# Altium PCB BugBuster_DAQ.PcbDoc (part 4 of 5)
Units mm, origin at the board's own origin, x right, y up, seen from the top; angles counter-clockwise.
Board outline 110 x 80 mm, 6 copper layers (Top Layer, Inner Layer 1, Inner Layer 2, Inner Layer 3, Inner Layer 4, Bottom Layer), stack 1.202 mm thick; 245 components, 205 nets, 1250 pads, 1565 vias.
Unrouted connection lines stored in the file: 8.
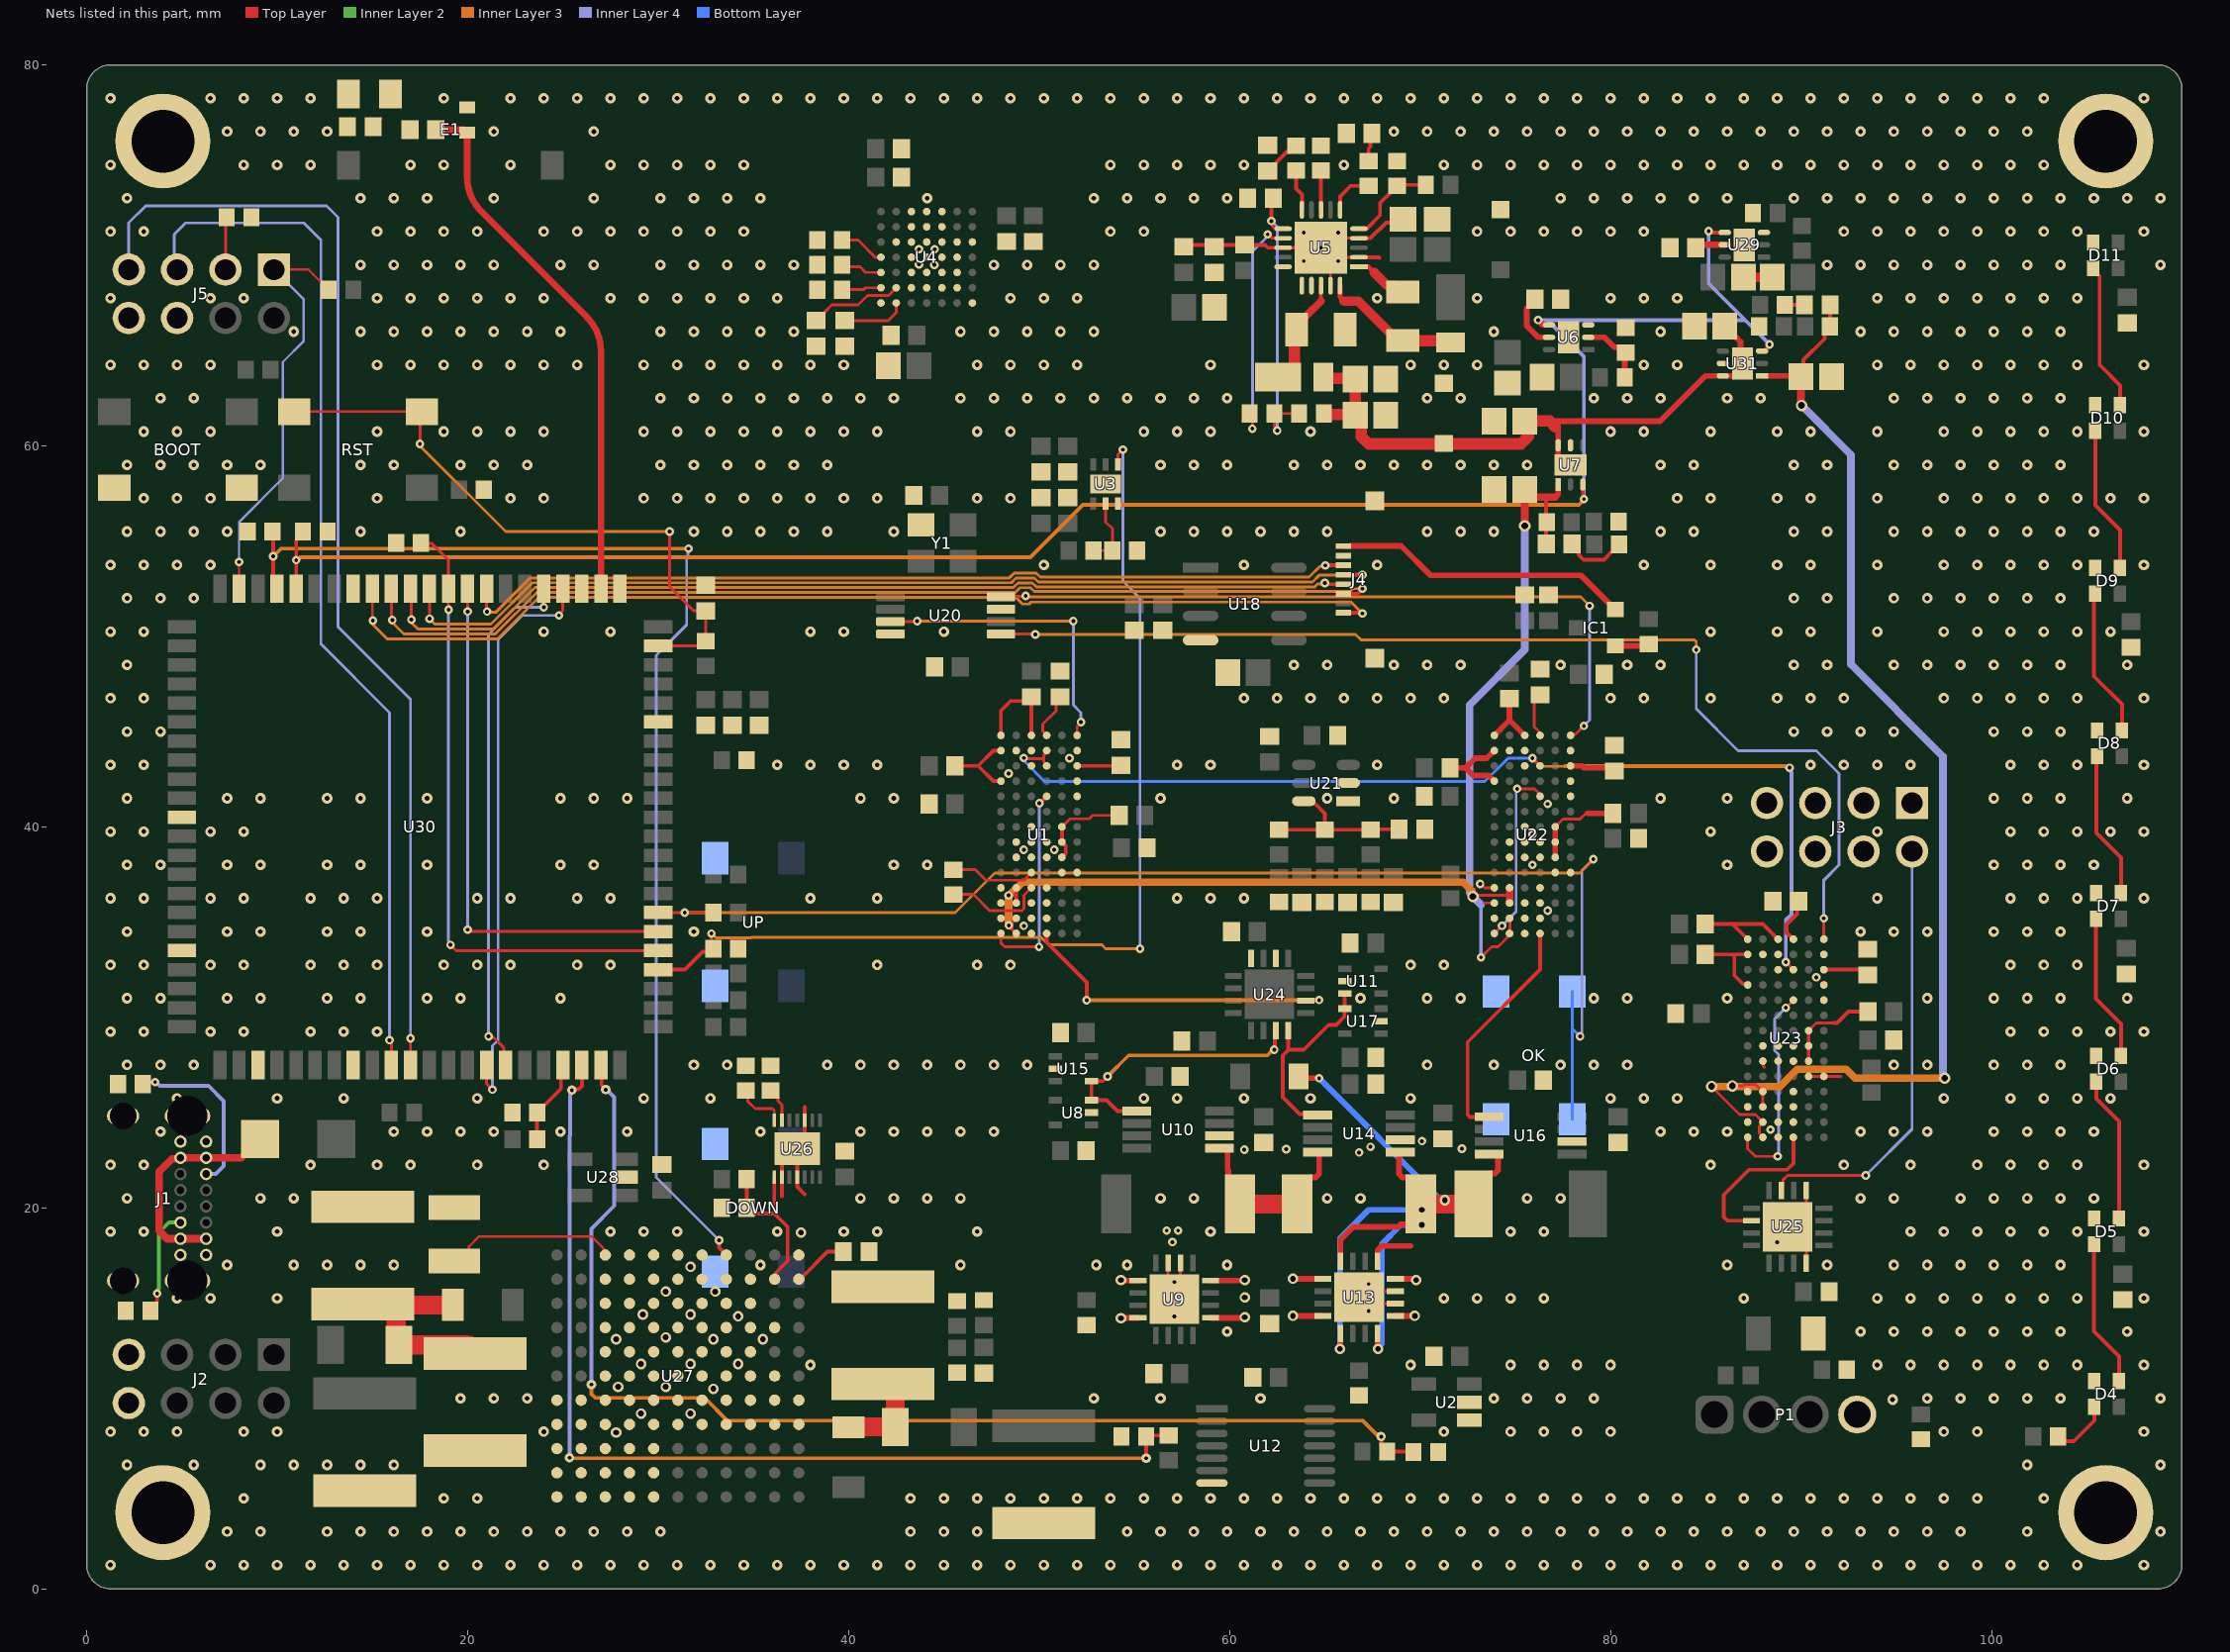
[diagram p7: the nets of this part, all layers, seen from the top]

## Via types
v1: diameter 0.55, hole 0.25, Top Layer to Bottom Layer, tented both sides, 1062 vias
v2: diameter 0.45, hole 0.2, Top Layer to Bottom Layer, tented both sides, 408 vias
v3: diameter 0.55, hole 0.3, Top Layer to Bottom Layer, tented both sides, 78 vias
v4: diameter 0.6, hole 0.35, Top Layer to Bottom Layer, tented both sides, 9 vias
v5: diameter 0.5, hole 0.2, Top Layer to Bottom Layer, tented both sides, 6 vias
v6: diameter 0.65, hole 0.35, Top Layer to Bottom Layer, tented both sides, 2 vias

## Nets (pads, with @x,y where several pads share a name; then routed paths per layer and width w, separated by ;. In a path a pad name is that pad's centre, name@x,y a point inside that pad or via, vN(x,y) a via of type N, cw(c..) or ccw(c..) an arc to the next point about the centre after c; other vN are vias at no path point) (continued)
-15V_LDO: C49.2 C50.1 R39.1 U1.B1 U1.B2 U1.B3 U1.B4 U7.1 U22.B1 U22.B2 U22.B3 U22.B4 | length 65.7
  Top Layer w0.15: v4(72.773,36.338) 72.835,36.4 74.7,36.4 ; v2(73.2,33.148) 73.752,33.7 74.1,33.7 74.597,34.197 74.597,34.228 74.7,34.331 U22.B1@74.7,34.4 74.727,34.427 74.727,35.173 U22.B2@74.7,35.2
  Top Layer w0.2: v2(48.4,36.4) 48.8,36.4 ; v2(48.411,34.827) v2@48.573,34.827 ; U1.B1@48.8,34.4 48.573,34.627 v2@48.573,34.827 ; U1.B2@48.8,35.2 48.573,34.973 v2@48.573,34.827 ; U1.B3@48.8,36 48.8,36.4 ; U1.B4@48.8,36.8 48.8,36.4 ; 76.5,57.3 76.625,57.175 C50.1@76.625,54.85
  Top Layer w0.3: 77.1,57.3 77.25,57.45 U7.1@77.25,57.972
  Top Layer w0.4: U22.B3@74.7,36 74.7,36.4 U22.B4@74.7,36.8 ; v4(75.5,55.8) C49.2@75.5,57.7 75.9,57.3 76.5,57.3 77.1,57.3
  Inner Layer 3 w0.4: v2@48.4,36.377 v2@48.4,36.366 ; v2(48.411,34.827) 48.411,34.841 48.4,34.852 v2@48.4,36.366 ; v4(72.773,36.338) 72.735,36.376 72.735,36.637 72.271,37.1 49.134,37.1 v2@48.4,36.366
  Inner Layer 4 w0.2: v2(73.2,33.148) 73.2,35.911
  Inner Layer 4 w0.4: 73.2,35.911 v4(72.773,36.338) 72.773,36.392 72.6,36.565 72.6,46.4 75.5,49.3 v4(75.5,55.8)
-24V_LDO: C96.2 C97.1 R77.1 U23.B1 U23.B2 U23.B3 U23.B4 U31.1 | length 66.3
  Top Layer w0.15: v4(85.3,26.375) 86.775,24.9 87.6,24.9 U23.B2@88,24.5 88,24.464 87.82,24.284 87.82,23.916 88,23.736 U23.B1@88,23.7 ; v4(86.4,26.4) 86.963,26.4 87.043,26.48 87.62,26.48 U23.B4@88,26.1 U23.B3@88,25.3
  Top Layer w0.2: C96.2@90,63.425 90.133,63.558 90.133,64.508 91.246,65.621 91.246,66.004 R77.1@91.517,66.275 91.53,66.288 C97.1@91.53,67.4
  Top Layer w0.3: U31.1@87.953,63.675 89.95,63.675 C96.2@90,63.625
  Top Layer w0.4: C96.2@90,63.425 90,62.15 v4(90.025,62.125)
  Inner Layer 3 w0.4: v4(85.3,26.375) 85.313,26.362 88.887,26.362 89.8,27.275 92.375,27.275 92.85,26.8 v4(97.55,26.8)
  Inner Layer 4 w0.4: v4(90.025,62.125) 92.625,59.525 92.625,48.525 97.45,43.7 97.45,26.954 97.55,26.854 v4(97.55,26.8)
-26V_BOOST: C19.2 C20.2 C48.2 C95.2 D2.2 D13.1 R23.1 U7.6 U7.7 U31.6 U31.7 | length 34.6
  Top Layer w0.3: 76.8,61.3 82.6,61.3 84.975,63.675 U31.6@85.897,63.675 86.525,63.675 86.925,64.075 U31.7@86.925,64.325 86.826,64.424 86.826,65.449 86.55,65.725 86.5,65.725 86,66.225 C95.2@86,66.275 ; 77.1,61 77.25,60.85 U7.6@77.25,60.028 77.25,59.4 77.65,59 U7.7@77.9,59
  Top Layer w0.6: D2.2@64.925,63.6 64.975,63.55 66.55,63.55 C20.2@66.6,63.5 C19.2@66.6,61.6 ; R23.1@64.95,61.7 65,61.65 66.55,61.65 C19.2@66.6,61.6 ; 77.1,61 76.8,61.3 C48.2@75.5,61.3 75.7,61.1 75.7,60.5 75.3,60.1 67.3,60.1 66.911,60.489 66.911,61.289 C19.2@66.6,61.6
ADAQ_IN1: U1.D1 U24.6 | length 17.3
  Top Layer w0.2: U1.D1@50.4,34.4 50.4,33.939 50.8,33.539 52.5,31.839 v2(52.5,30.9) ; U24.6@64.002,30.875 64.018,30.89 64.685,30.89 v2(64.7,30.906)
  Inner Layer 3 w0.2: v2(52.5,30.9) 64.694,30.9 v2(64.7,30.906)
ADAQ_IN3: U23.D1 U25.6 | length 8.4
  Top Layer w0.2: U25.6@87.398,19.325 86.15,19.325 85.95,19.525 85.95,20.675 87.275,22 89.275,22 89.6,22.325 U23.D1@89.6,23.7
C6_BOOT: U30.9 U30.72 | length 27.9
  Top Layer w0.15: v2(20,34.6) 20.081,34.6 20.181,34.5 U30.72@30,34.5 ; v2(20,51.3) U30.9@20,52.5
  Inner Layer 4 w0.15: v2(20,34.6) v2(20,51.3)
C6_RST: R65.1 U30.10 U30.71 | length 33.1
  Top Layer w0.15: R65.1@17.55,54.9 17.562,54.888 18.112,54.888 19,54 U30.10@19,52.5 v2(19,51.4) ; v2(19.1,33.8) 19.4,33.5 U30.71@30,33.5
  Inner Layer 4 w0.15: v2(19,51.4) 19,33.981 19.1,33.881 v2(19.1,33.8)
C6_RX: U30.5 U30.60 | length 27.6
  Top Layer w0.15: v2(21.1,29) 21.157,28.943 21.354,28.943 21.909,28.387 21.909,27.591 U30.60@22,27.5 ; v2(24,51.527) U30.5@24,52.5
  Inner Layer 4 w0.15: v2(21.1,29) 21.1,50.1 22.527,51.527 v2(24,51.527)
C6_TX: U30.4 U30.59 | length 30.4
  Top Layer w0.15: U30.59@21,27.5 21,26.5 v2(21.3,26.2) ; v2(24.8,51.1) 24.8,51.138 25,51.338 U30.4@25,52.5
  Inner Layer 4 w0.15: v2(21.3,26.2) 21.3,28.5 21.6,28.8 21.6,49.85 22.85,51.1 v2(24.8,51.1)
CLOCK_0: U1.F14 U20.3 | length 15.9
  Top Layer w0.15: U20.3@42.2,50.775 43.575,50.775 v2(43.6,50.8) ; U1.F14@52,44.8 52,45.262 52.2,45.462 v2(52.2,45.5)
  Inner Layer 3 w0.15: v2(43.6,50.8) v2(51.8,50.8)
  Inner Layer 4 w0.15: v2(51.8,50.8) 51.8,46.4 52.2,46 v2(52.2,45.5)
CLOCK_1: U20.8 U22.F14 | length 38.5
  Top Layer w0.15: U20.8@48,52.075 48.024,52.099 49.276,52.099 v2(49.3,52.123) ; U22.F14@77.9,44.8 77.949,44.849 78.149,44.849 v2(78.6,45.3)
  Inner Layer 3 w0.15: v2(49.3,52.123) 49.352,52.071 78.429,52.071 v2(78.9,51.6)
  Inner Layer 4 w0.15: v2(78.6,45.3) 78.9,45.6 v2(78.9,51.6)
CLOCK_2: U20.5 U23.F14 | length 58.1
  Top Layer w0.15: U20.5@48,50.125 49.775,50.125 v2(49.8,50.1) ; U23.F14@91.2,34.1 v2(91.2,35.2)
  Inner Layer 3 w0.15: v2(49.8,50.1) 66.62,50.1 66.912,49.807 84.412,49.807 84.5,49.72 84.5,49.302 v2(84.502,49.3)
  Inner Layer 4 w0.15: v2(84.502,49.3) 84.502,46.198 86.7,44 90.8,44 92,42.8 92,38 91.2,37.2 v2(91.2,35.2)
CLOCK_3: U20.7
CSA_2: U11.3 U14.5 U17.4 U24.4 | length 10.7
  Top Layer w0.2: U24.4@63.075,29.298 63.075,28.325 63.1,28.3 ; U14.5@64.628,24.875 64.587,24.917 63.683,24.917 62.8,25.8 62.8,28 63.1,28.3 ; U11.3@66.05,31.25 U17.4@66.05,30.45 66.05,30.05 65.6,29.6 65.2,29.6 63.9,28.3 63.1,28.3
CSA_005: U16.5 U22.D1 | length 12.3
  Top Layer w0.2: U16.5@73.628,24.775 72.617,24.775 72.5,24.892 72.5,28.7 76.3,32.5 U22.D1@76.3,34.4
CSA_51: U8.3 U10.5 U15.4 U24.3 | length 14.9
  Top Layer w0.2: v2(53.6,26.9) 53.35,26.65 U15.4@52.75,26.65 U8.3@52.75,25.65 53.55,25.65 54.125,25.075 U10.5@55.128,25.075 ; v2(62.348,28.3) 62.386,28.339 62.386,29.259 U24.3@62.425,29.298
  Inner Layer 3 w0.2: v2(53.6,26.9) 54.7,28 61.98,28 62.28,28.3 v2(62.348,28.3)
DAQ_SYNC: U1.D12 U1.D13 U22.D12 U23.D12 | length 55
  Top Layer w0.15: v2(49.2,43.615) 49.232,43.583 50.25,43.583 ; U1.D12@50.4,43.2 50.4,43.266 50.25,43.416 50.25,43.583 ; U1.D13@50.4,44 50.4,43.931 50.297,43.828 50.297,43.797 50.25,43.75 50.25,43.583 ; v2(89.2,32.9) U23.D12@89.6,32.5
  Top Layer w0.2: v2(75.9,43.6) U22.D12@76.3,43.2
  Inner Layer 3 w0.127: v2(75.9,43.6) 76.321,43.179 77.6,43.179
  Inner Layer 3 w0.2: 77.6,43.179 89.158,43.179 89.189,43.148 89.352,43.148 v2(89.4,43.1)
  Inner Layer 4 w0.2: v2(89.2,32.9) 89.2,35.1 89.5,35.4 89.5,42.858 89.448,42.91 89.448,43.052 v2(89.4,43.1)
  Bottom Layer w0.15: v2(49.2,43.615) 49.257,43.558 49.257,43.418 50.287,42.388 50.999,42.388 51.012,42.375 73.4,42.375 74.625,43.6 v2(75.9,43.6)
DN_KEY: OK.B1 OK.B2 R44.1 U30.73 | length 68.6
  Top Layer w0.15: U30.73@30,35.5 v2(31.4,35.5) R44.1@32.9,35.5
  Inner Layer 3 w0.15: v2(31.4,35.5) 45.6,35.5 47.675,37.575 78.375,37.575 v2(79.1,38.3)
  Inner Layer 4 w0.15: v2(78.4,29) 78.4,29.081 78.5,29.181 78.5,37.7 v2(79.1,38.3)
  Bottom Layer w0.15: OK.B2@78,24.65 78,29.4 ; OK.B1@78,31.35 78,29.4 ; v2(78.4,29) 78,29.4
EN_PGA1: U1.A1 U1.D10 | length 10.7
  Top Layer w0.15: U1.A1@48,34.4 48,33.9 48.2,33.7 49.996,33.7 v2(49.998,33.698)
  Top Layer w0.2: v2(50.018,41.234) 50.034,41.234 U1.D10@50.4,41.6
  Inner Layer 4 w0.15: v2(49.998,33.698) 50.018,33.718 v2(50.018,41.234)
EN_PGA2: U22.A1 U22.D10 | length 9.6
  Top Layer w0.15: U22.A1@73.9,34.4 v2(74.3,34.8) ; v2(75.1,42) 76,42 76.197,41.803 76.197,41.772 76.3,41.669 U22.D10@76.3,41.6
  Inner Layer 4 w0.15: v2(74.3,34.8) 74.3,34.9 74.302,34.898 74.398,34.898 75.043,35.543 75.043,41.943 v2(75.1,42)
EN_PGA3: U23.A1 U23.D10 | length 11.1
  Top Layer w0.15: U23.A1@87.197,23.703 87.197,23.103 87.6,22.7 v2(88.773,22.7) ; v2(89.2,30.5) U23.D10@89.6,30.9
  Inner Layer 4 w0.15: v2(88.773,22.7) 88.827,22.754 88.827,28.048 88.625,28.25 88.625,29.925 v2(89.2,30.5)
EXT_A0: U24.10
GND: BOOT.A1 BOOT.A2 C1.1 C2.1 C3.1 C4.1 C5.1 C6.1 C7.1 C8.1 C9.1 C10.1 C11.1 C12.1 C13.1 C14.1 C15.1 C16.1 C17.2 C18.1 C19.1 C20.1 C21.1 C22.1 C23.1 C24.1 C25.1 C26.1 C27.2 C28.1 C29.1 C30.1 C31.1 C32.1 C33.1 C34.1 C35.1 C36.2 C37.1 C38.1 C39.1 C40.1 C41.1 C42.1 C43.2 C44.1 C45.1 C46.1 C47.2 C48.1 C49.1 C51.1 C52.1 C53.1 C54.1 C55.1 C56.1 C57.1 C58.1 C59.1 C60.1 C61.1 C62.1 C63.1 C64.1 C65.1 C66.1 C67.1 C68.1 C69.1 C70.1 C72.1 C73.1 C74.1 C75.1 C76.1 C77.1 C78.1 C79.1 C80.1 C81.1 C82.1 C83.1 C84.1 C86.1 C87.1 C88.1 C89.1 C90.1 C91.1 C92.1 C93.1 C94.2 C95.1 C96.1 C98.1 D4.2 D5.2 D6.2 D7.2 D8.2 D9.2 D10.2 D11.2 D12.1 D13.2 DNP.2 DOWN.A1 DOWN.A2 E1.1 J1.1 J1.2 J1.3 J1.4 J1.A1 J1.A12 J1.B1 J1.B12 J2.7 J2.8 J3.1 J3.3 J3.5 J3.7 J4.7 J4.MP1 J4.MP2 J5.6 J5.8 L1.2 L3.1 OK.A1 OK.A2 P1.4 pad.1 pad.2 pad.3 pad.4 R2.1 R3.1 R5.1 R6.1 R8.1 R9.1 R10.1 R11.1 R14.1 R18.1 R19.1 R20.2 R21.1 R22.1 R25.1 R28.1 R34.1 R35.1 R36.1 R37.1 R41.2 R54.1 R57.1 R59.1 R60.1 R61.2 R62.1 R63.1 R64.2 R65.2 R70.2 R71.2 R75.1 U1.A2 U1.A3 U1.A4 U1.B6 U1.B7 U1.B13 U1.C1 U1.C2 U1.C3 U1.C6 U1.C7 U1.C8 U1.C12 U1.C13 U1.D2 U1.D3 U1.D4 U1.D6 U1.D7 U1.E5 U1.F5 U1.F10 U1.F11 U1.F13 U2.1 U2.2 U3.3 U3.7 U4.A1 U4.A7 U4.B2 U4.B3 U4.B4 U4.B5 U4.C2 U4.C3 U4.C4 U4.C5 U4.D2 U4.D3 U4.D4 U4.D5 U4.E1 U4.E2 U4.E3 U4.E4 U4.E5 U4.E6 U4.F3 U4.F4 U4.F5 U4.G3 U4.G4 U4.G5 U5.2 U5.4 U5.13 U5.19 U5.21 U6.3 U6.7 U7.5 U8.2 U9.2 U9.3 U9.17 U10.2 U11.2 U12.7 U13.2 U13.3 U13.17 U14.2 U15.2 U16.2 U17.2 U18.4 U20.4 U21.1 U21.2 U22.A2 U22.A3 U22.A4 U22.B6 U22.B7 U22.B13 U22.C1 U22.C2 U22.C3 U22.C6 U22.C7 U22.C8 U22.C12 U22.C13 U22.D2 U22.D3 U22.D4 U22.D6 U22.D7 U22.E5 U22.F5 U22.F10 U22.F11 U22.F13 U23.A2 U23.A3 U23.A4 U23.B6 U23.B7 U23.B13 U23.C1 U23.C2 U23.C3 U23.C6 U23.C7 U23.C12 U23.C13 U23.D2 U23.D3 U23.D4 U23.D6 U23.D7 U23.E5 U23.F5 U23.F10 U23.F11 U23.F13 U24.12 U25.1 U25.12 U25.17 U26.3 U26.9 U26.11 U26.15 U27.A7 U27.A8 U27.A9 U27.A10 U27.A11 U27.B7 U27.B8 U27.B9 U27.B10 U27.B11 U27.C7 U27.C8 U27.C9 U27.C10 U27.C11 U27.D2 U27.D3 U27.D4 U27.D5 U27.D6 U27.D7 U27.D8 U27.D9 U27.D10 U27.D11 U27.E1 U27.E2 U27.E3 U27.E4 U27.E5 U27.E6 U27.E7 U27.E8 U27.E9 U27.E10 U27.E11 U27.F2 U27.F3 U27.F4 U27.F5 U27.F6 U27.F7 U27.F8 U27.F9 U27.G3 U27.G4 U27.G5 U27.G6 U27.G7 U27.G8 U27.G9 U27.H2 U27.H3 U27.H4 U27.H5 U27.H6 U27.H7 U27.H8 U27.H9 U27.J3 U27.J4 U27.J5 U27.J6 U27.J7 U27.J8 U27.J9 U27.K3 U27.K4 U27.K5 U27.K6 U27.K7 U27.K8 U27.K9 U27.L1 U27.L5 U27.L6 U27.L7 U27.L8 U28.2 U29.3 U29.7 U30.1 U30.3 U30.15 U30.33 U30.40 U30.47 U30.52 U30.83 U31.5 UP.A1 UP.A2 Y1.2 | length 42.5
  Top Layer w0.15: U9.3@56.775,17.102 56.775,15.525 U9.17@57.1,15.2 57.425,15.525 U9.2@57.425,17.102 ; U5.19@65.3,68.409 U5.21@65.3,69.9 ; U5.2@66.791,69.9 U5.21@65.3,69.9 ; U5.4@66.791,70.9 65.3,70.9 v2(64.8,70.4) U5.21@65.3,69.9 ; U13.2@68.702,14.975 67.125,14.975 U13.17@66.8,15.3 67.125,15.625 U13.3@68.702,15.625 ; v2(73.152,37) 73.19,37 73.39,36.8 U22.A4@73.9,36.8 ; 73.4,36 U22.A3@73.9,36 ; U23.B6@88,27.7 88.027,27.673 88.027,27.414 88.064,27.377 ; U25.12@90.275,17.098 90.275,18.025 U25.17@89.3,19 90.275,19.975 U25.1@90.275,20.902 ; U23.E5@90.4,26.9 92.1,26.9
  Top Layer w0.2: 36.5,20.6 U26.9@36.5,21.601 36.5,22.349 37.251,23.1 U26.15@37.3,23.1 ; 37.7,20.7 37.3,21.1 U26.11@37.3,21.601 U26.15@37.3,23.1 ; 37.7,25.3 U26.3@37.7,24.599 37.7,23.5 U26.15@37.3,23.1 ; C12.1@57.6,70.45 57.7,70.55 C17.2@60.8,70.55 61.85,70.55 62,70.4 U5.13@62.809,70.4 v2(64.8,70.4) ; U5.2@66.791,69.9 67.85,69.9 67.875,69.875 ; U5.4@66.791,70.9 67.4,70.9 68.217,71.717 68.917,71.717 C16.1@69.1,71.9
  Top Layer w0.5: C93.1@86.975,68.85 C92.1@88.5,68.85
  other v1: 1.25,1.25 6.5,1.25 8.25,1.25 10,1.25 11.75,1.25 13.5,1.25 15.25,1.25 17,1.25 18.75,1.25 20.5,1.25 22.25,1.25 24,1.25 25.75,1.25 27.5,1.25 29.25,1.25 31,1.25 32.75,1.25 34.5,1.25 36.25,1.25 38,1.25 39.75,1.25 41.5,1.25 43.25,1.25 45,1.25 46.75,1.25 48.5,1.25 50.25,1.25 52,1.25 53.75,1.25 55.5,1.25 57.25,1.25 59,1.25 60.75,1.25 62.5,1.25 64.25,1.25 66,1.25 67.75,1.25 69.5,1.25 71.25,1.25 73,1.25 74.75,1.25 76.5,1.25 78.25,1.25 80,1.25 81.75,1.25 83.5,1.25 85.25,1.25 87,1.25 88.75,1.25 90.5,1.25 92.25,1.25 94,1.25 95.75,1.25 97.5,1.25 99.25,1.25 101,1.25 102.75,1.25 104.5,1.25 108,1.25 7.375,3 9.125,3 12.625,3 14.375,3 16.125,3 17.875,3 19.625,3 21.375,3 23.125,3 24.875,3 26.625,3 28.375,3 30.125,3 43.25,3 45,3 46.75,3 54.625,3 56.375,3 58.125,3 59.875,3 61.625,3 63.375,3 65.125,3 66.875,3 68.625,3 70.375,3 72.125,3 73.875,3 75.625,3 77.375,3 79.125,3 80.875,3 82.625,3 84.375,3 86.125,3 87.875,3 89.625,3 91.375,3 93.125,3 94.875,3 96.625,3 98.375,3 101.875,3 108.875,3 8.25,4.75 18.75,4.75 20.5,4.75 43.25,4.75 45,4.75 46.75,4.75 48.5,4.75 50.25,4.75 52,4.75 53.75,4.75 55.5,4.75 57.25,4.75 59,4.75 60.75,4.75 62.5,4.75 64.25,4.75 66,4.75 67.75,4.75 69.5,4.75 71.25,4.75 73,4.75 74.75,4.75 76.5,4.75 78.25,4.75 80,4.75 81.75,4.75 83.5,4.75 85.25,4.75 87,4.75 88.75,4.75 90.5,4.75 92.25,4.75 94,4.75 95.75,4.75 97.5,4.75 99.25,4.75 102.75,4.75 2.125,6.5 5.625,6.5 9.125,6.5 10.875,6.5 12.625,6.5 14.375,6.5 16.125,6.5 101.875,6.5 108.875,6.5 1.25,8.25 3,8.25 4.75,8.25 8.25,8.25 10,8.25 24,8.25 71.25,8.25 74.75,8.25 76.5,8.25 78.25,8.25 80,8.25 97.5,8.25 99.25,8.25 108,8.25 94.808,9.933 19.625,10 21.375,10 23.125,10 52.875,10 56.375,10 61.625,10 73.875,10 75.625,10 77.375,10 79.125,10 96.625,10 98.375,10 100.125,10 101.875,10 103.625,10 108.875,10 38,11.75 69.5,11.75 74.75,11.75 76.5,11.75 78.25,11.75 80,11.75 94,11.75 95.75,11.75 97.5,11.75 99.25,11.75 101,11.75 102.75,11.75 104.5,11.75 108,11.75 59.875,13.5 93.125,13.5 94.875,13.5 96.625,13.5 98.375,13.5 100.125,13.5 101.875,13.5 103.625,13.5 107.125,13.5 4.75,15.25 6.5,15.25 10,15.25 71.25,15.25 73,15.25 74.75,15.25 76.5,15.25 87,15.25 94,15.25 95.75,15.25 97.5,15.25 99.25,15.25 101,15.25 102.75,15.25 104.5,15.25 108,15.25 7.375,17 10.875,17 12.625,17 14.375,17 16.125,17 35.375,17 45.875,17 53.002,17 54.625,17 59.875,17 86.125,17 91.375,17 94.875,17 96.625,17 98.375,17 100.125,17 101.875,17 103.625,17 1.25,18.75 3,18.75 10,18.75 27.5,18.75 29.25,18.75 31,18.75 36.25,18.75 39.75,18.75 41.5,18.75 46.75,18.75 59,18.75 74.75,18.75 76.5,18.75 95.75,18.75 97.5,18.75 99.25,18.75 101,18.75 102.75,18.75 104.5,18.75 108,18.75 2.125,20.5 9.125,20.5 10.875,20.5 40.625,20.5 42.375,20.5 44.125,20.5 45.875,20.5 56.375,20.5 58.125,20.5 65.125,20.5 66.875,20.5 75.625,20.5 77.375,20.5 93.125,20.5 94.875,20.5 98.375,20.5 100.125,20.5 101.875,20.5 103.625,20.5 105.375,20.5 1.25,22.25 3,22.25 11.75,22.25 15.25,22.25 17,22.25 20.5,22.25 24,22.25 85.25,22.25 92.25,22.25 95.75,22.25 99.25,22.25 101,22.25 102.75,22.25 104.5,22.25 108,22.25 3.875,24 16.125,24 17.875,24 19.625,24 21.375,24 24.875,24 28.375,24 35.375,24 40.625,24 42.375,24 44.125,24 45.875,24 47.625,24 82.625,24 84.375,24 86.125,24 93.125,24 94.875,24 96.625,24 100.125,24 101.875,24 103.625,24 105.375,24 4.75,25.75 10,25.75 13.5,25.75 20.5,25.75 29.25,25.75 32.75,25.75 55.5,25.75 57.25,25.75 60.75,25.75 64.25,25.75 69.5,25.75 80,25.75 81.75,25.75 83.5,25.75 97.5,25.75 101,25.75 102.75,25.75 104.5,25.75 106.25,25.75 2.125,27.5 3.875,27.5 5.625,27.5 31.875,27.5 33.625,27.5 38.875,27.5 40.625,27.5 42.375,27.5 44.125,27.5 45.875,27.5 47.625,27.5 49.375,27.5 70.375,27.5 73.875,27.5 77.375,27.5 79.125,27.5 80.875,27.5 94.875,27.5 96.625,27.5 100.125,27.5 101.875,27.5 103.625,27.5 1.25,29.25 3,29.25 6.5,29.25 8.25,29.25 11.75,29.25 13.5,29.25 15.25,29.25 101,29.25 102.75,29.25 104.5,29.25 106.25,29.25 108,29.25 2.125,31 3.875,31 7.375,31 9.125,31 12.625,31 14.375,31 17.875,31 19.625,31 24.875,31 66.875,31 70.375,31 72.125,31 79.125,31 80.875,31 86.125,31 96.625,31 100.125,31 101.875,31 103.625,31 107.125,31 1.25,32.75 3,32.75 6.5,32.75 8.25,32.75 11.75,32.75 13.5,32.75 15.25,32.75 18.75,32.75 20.5,32.75 22.25,32.75 25.75,32.75 27.5,32.75 41.5,32.75 46.75,32.75 48.5,32.75 69.5,32.75 71.25,32.75 101,32.75 102.75,32.75 104.5,32.75 2.125,34.5 7.375,34.5 9.125,34.5 12.625,34.5 14.375,34.5 17.875,34.5 31.875,34.5 93.125,34.5 94.875,34.5 96.625,34.5 100.125,34.5 101.875,34.5 103.625,34.5 1.25,36.25 3,36.25 6.5,36.25 8.25,36.25 11.75,36.25 13.5,36.25 15.25,36.25 20.5,36.25 22.25,36.25 25.75,36.25 27.5,36.25 38,36.25 41.5,36.25 57.25,36.25 59,36.25 60.75,36.25 94,36.25 101,36.25 102.75,36.25 104.5,36.25 108,36.25 2.125,38 3.875,38 7.375,38 9.125,38 12.625,38 14.375,38 17.875,38 24.875,38 26.625,38 42.375,38 44.125,38 86.125,38 100.125,38 101.875,38 103.625,38 105.375,38 1.25,39.75 3,39.75 6.5,39.75 8.25,39.75 85.25,39.75 94,39.75 101,39.75 102.75,39.75 104.5,39.75 106.25,39.75 108,39.75 2.125,41.5 7.375,41.5 9.125,41.5 12.625,41.5 14.375,41.5 17.875,41.5 24.875,41.5 26.625,41.5 28.375,41.5 40.625,41.5 42.375,41.5 56.375,41.5 65.125,41.5 68.625,41.5 82.625,41.5 86.125,41.5 100.125,41.5 101.875,41.5 103.625,41.5 107.125,41.5 1.25,43.25 3,43.25 36.25,43.25 38,43.25 39.75,43.25 41.5,43.25 57.25,43.25 59,43.25 67.75,43.25 90.5,43.25 92.25,43.25 94,43.25 95.75,43.25 101,43.25 102.75,43.25 104.5,43.25 108,43.25 2.125,45 3.875,45 89.625,45 91.375,45 93.125,45 94.875,45 100.125,45 101.875,45 103.625,45 1.25,46.75 3,46.75 60.75,46.75 62.5,46.75 64.25,46.75 66,46.75 67.75,46.75 69.5,46.75 71.25,46.75 80,46.75 81.75,46.75 85.25,46.75 88.75,46.75 90.5,46.75 92.25,46.75 97.5,46.75 99.25,46.75 101,46.75 102.75,46.75 104.5,46.75 108,46.75 2.125,48.5 63.375,48.5 65.125,48.5 68.625,48.5 70.375,48.5 72.125,48.5 77.375,48.5 80.875,48.5 82.625,48.5 89.625,48.5 91.375,48.5 94.875,48.5 96.625,48.5 98.375,48.5 100.125,48.5 101.875,48.5 103.625,48.5 107.125,48.5 1.25,50.25 3,50.25 24,50.25 27.5,50.25 38,50.25 39.75,50.25 45,50.25 85.25,50.25 88.75,50.25 90.5,50.25 94,50.25 97.5,50.25 99.25,50.25 101,50.25 102.75,50.25 104.5,50.25 106.25,50.25 2.125,52 3.875,52 5.625,52 89.625,52 91.375,52 94.875,52 96.625,52 98.375,52 100.125,52 101.875,52 103.625,52 1.25,53.75 3,53.75 4.75,53.75 6.5,53.75 50.25,53.75 60.75,53.75 67.75,53.75 81.75,53.75 85.25,53.75 88.75,53.75 90.5,53.75 94,53.75 97.5,53.75 99.25,53.75 101,53.75 102.75,53.75 104.5,53.75 108,53.75 2.125,55.5 3.875,55.5 5.625,55.5 7.375,55.5 14.375,55.5 19.625,55.5 31.875,55.5 33.625,55.5 35.375,55.5 37.125,55.5 38.875,55.5 42.375,55.5 56.375,55.5 58.125,55.5 59.875,55.5 61.625,55.5 63.375,55.5 65.125,55.5 70.375,55.5 72.125,55.5 73.875,55.5 82.625,55.5 84.375,55.5 89.625,55.5 91.375,55.5 94.875,55.5 96.625,55.5 98.375,55.5 100.125,55.5 101.875,55.5 103.625,55.5 105.375,55.5 3,57.25 4.75,57.25 6.5,57.25 15.25,57.25 22.25,57.25 24,57.25 29.25,57.25 31,57.25 32.75,57.25 34.5,57.25 36.25,57.25 38,57.25 39.75,57.25 41.5,57.25 46.75,57.25 48.5,57.25 83.5,57.25 85.25,57.25 88.75,57.25 90.5,57.25 94,57.25 97.5,57.25 99.25,57.25 101,57.25 102.75,57.25 104.5,57.25 106.25,57.25 108,57.25 2.125,59 3.875,59 5.625,59 7.375,59 9.125,59 14.375,59 16.125,59 19.625,59 21.375,59 23.125,59 30.125,59 31.875,59 33.625,59 35.375,59 37.125,59 38.875,59 56.375,59 58.125,59 59.875,59 63.375,59 65.125,59 66.875,59 68.625,59 70.375,59 72.125,59 73.875,59 75.625,59 82.625,59 84.375,59 89.625,59 91.375,59 94.875,59 96.625,59 98.375,59 100.125,59 101.875,59 103.625,59 3,60.75 4.75,60.75 6.5,60.75 15.25,60.75 18.75,60.75 20.5,60.75 22.25,60.75 24,60.75 29.25,60.75 31,60.75 32.75,60.75 34.5,60.75 36.25,60.75 38,60.75 39.75,60.75 41.5,60.75 46.75,60.75 48.5,60.75 55.5,60.75 57.25,60.75 59,60.75 64.25,60.75 80,60.748 81.75,60.748 85.25,60.75 88.75,60.75 90.5,60.75 94,60.75 97.5,60.75 99.25,60.75 101,60.75 102.75,60.75 104.5,60.75 108,60.75 3.875,62.5 5.625,62.5 30.125,62.5 31.875,62.5 33.625,62.5 35.375,62.5 37.125,62.5 38.875,62.5 40.625,62.5 42.375,62.5 45.875,62.5 47.625,62.5 49.375,62.5 51.125,62.5 52.875,62.5 54.625,62.5 56.375,62.5 58.125,62.5 59.875,62.5 70.375,62.5 72.125,62.5 79.125,62.5 80.875,62.5 82.625,62.5 86.125,62.5 87.875,62.5 94.875,62.5 96.625,62.5 98.375,62.5 100.125,62.5 101.875,62.5 103.625,62.5 1.25,64.25 3,64.25 4.75,64.25 6.5,64.25 15.25,64.25 17,64.25 18.75,64.25 20.5,64.25 22.25,64.25 24,64.25 25.75,64.25 29.25,64.25 31,64.25 32.75,64.25 34.5,64.25 36.25,64.25 38,64.25 39.75,64.25 46.75,64.25 48.5,64.25 50.25,64.25 52,64.25 59,64.25 69.5,64.25 71.25,64.25 73,64.25 81.75,64.25 83.5,64.25 94,64.25 95.75,64.25 97.5,64.25 99.25,64.25 101,64.25 102.75,64.25 104.5,64.25 108,64.25 10.875,66 14.375,66 16.125,66 17.875,66 19.625,66 21.375,66 23.125,66 24.875,66 30.125,66 31.875,66 33.625,66 35.375,66 37.125,66 45.875,66 47.625,66 49.375,66 51.125,66 52.875,66 73.875,66 82.625,66 93.125,66 94.875,66 96.625,66 98.375,66 100.125,66 101.875,66 103.625,66 1.25,67.75 6.5,67.75 8.25,67.75 15.25,67.75 17,67.75 18.75,67.75 20.5,67.75 22.25,67.75 24,67.75 27.5,67.75 29.25,67.75 31,67.75 32.75,67.75 34.5,67.75 36.25,67.75 48.5,67.75 50.25,67.75 52,67.75 67.75,67.75 73,67.75 80,67.75 81.75,67.75 83.5,67.75 94,67.75 95.75,67.75 97.5,67.75 99.25,67.75 101,67.75 102.75,67.75 104.5,67.75 14.375,69.5 16.125,69.5 17.875,69.5 19.625,69.5 21.375,69.5 24.875,69.5 26.625,69.5 30.125,69.5 31.875,69.5 33.625,69.5 35.375,69.5 37.125,69.5 47.625,69.5 49.375,69.5 51.125,69.5 52.875,69.5 91.375,69.5 93.125,69.5 94.875,69.5 96.625,69.5 98.375,69.5 100.125,69.5 101.875,69.5 103.625,69.5 108.875,69.5 1.25,71.25 3,71.25 15.25,71.25 17,71.25 18.75,71.25 20.5,71.25 24,71.25 25.75,71.25 27.5,71.25 29.25,71.25 31,71.25 32.75,71.25 34.5,71.25 53.75,71.25 55.5,71.25 73,71.25 74.75,71.25 76.5,71.25 78.25,71.25 80,71.25 81.75,71.25 92.25,71.25 94,71.25 95.75,71.25 97.5,71.25 99.25,71.25 101,71.25 102.75,71.25 104.5,71.25 108,71.25 2.125,73 14.375,73 16.125,73 17.875,73 21.375,73 26.625,73 30.125,73 31.875,73 33.625,73 35.375,73 44.125,73 52.875,73 54.625,73 56.375,73 58.125,73 59.875,73 77.375,73 79.125,73 80.875,73 82.625,73 84.375,73 86.125,73 89.625,73 91.375,73 93.125,73 94.875,73 96.625,73 98.375,73 100.125,73 101.875,73 103.625,73 105.375,73 107.125,73 108.875,73 1.25,74.75 8.25,74.75 10,74.75 11.75,74.75 17,74.75 18.75,74.75 22.25,74.75 27.5,74.75 29.25,74.75 31,74.75 32.75,74.75 34.5,74.75 53.75,74.75 55.5,74.75 57.25,74.75 59,74.75 60.75,74.75 66,74.75 71.25,74.75 73,74.75 74.75,74.75 76.5,74.75 78.25,74.75 80,74.75 81.75,74.75 83.5,74.75 85.25,74.75 87,74.75 88.75,74.75 90.5,74.75 92.25,74.75 94,74.75 95.75,74.75 97.5,74.75 99.25,74.75 101,74.75 102.75,74.75 7.375,76.5 9.125,76.5 10.875,76.5 12.625,76.5 21.375,76.5 26.625,76.5 68.625,76.5 70.375,76.5 72.125,76.5 73.875,76.5 75.625,76.5 77.375,76.5 79.125,76.5 80.875,76.5 82.625,76.5 84.375,76.5 86.125,76.5 87.875,76.5 89.625,76.5 91.375,76.5 93.125,76.5 94.875,76.5 96.625,76.5 98.375,76.5 100.125,76.5 101.875,76.5 1.25,78.25 6.5,78.25 8.25,78.25 10,78.25 11.75,78.25 18.75,78.25 22.25,78.25 24,78.25 25.75,78.25 27.5,78.25 29.25,78.25 31,78.25 32.75,78.25 34.5,78.25 36.25,78.25 38,78.25 39.75,78.25 41.5,78.25 43.25,78.25 45,78.25 46.75,78.25 48.5,78.25 50.25,78.25 52,78.25 53.75,78.25 55.5,78.25 57.25,78.25 59,78.25 60.75,78.25 62.5,78.25 64.25,78.25 66,78.25 67.75,78.25 69.5,78.25 71.25,78.25 73,78.25 74.75,78.25 76.5,78.25 78.25,78.25 80,78.25 81.75,78.25 83.5,78.25 85.25,78.25 87,78.25 88.75,78.25 90.5,78.25 92.25,78.25 94,78.25 95.75,78.25 97.5,78.25 99.25,78.25 101,78.25 102.75,78.25 108,78.25
  other v2: 57.1,14.3 67.301,14.59 67.3,16 57.1,16.1 57,18.2 88.752,18.2 56.7,18.8 57.3,18.8 66.8,22.9 60.775,23.05 62.975,23.075 72.2,23.1 67.4,23.2 70.1,23.5 88.4,24.1 90.8,32.1 49.2,34.8 76.7,35.6 75.9,38.002 49.2,38.8 50.8,38.8 75.9,39.6 76.7,41.2 48.4,42.8 51.6,43.6 44.5,69.5 43.7,69.525 63.9,69.7 65.7,69.7 43.7,70.325 44.525,70.325 63.9,71.2 65.7,71.2
  other v3: 27.8,8.2 29.1,9.2 31.7,9.2 32.9,10.5 27.9,10.6 30.4,10.6 29.1,11.8 31.7,11.8 34.2,11.8 27.8,13.1 32.9,13.1 35.5,13.1 30.4,13.2 34.2,14.3 29.2,14.4 31.7,14.4 30.4,15.6 33,15.6 31.7,16.9 37.5,18.7
I_FB_DCDC: R58.1 R59.2 U26.8 U27.K2 | length 9
  Top Layer w0.2: R58.1@34.65,21.5 R59.2@34.65,20 34.95,19.7 36.1,19.7 ; U26.8@36.1,21.601 36.1,19.7 ; U27.K2@36.12,16.25 36.197,16.327 36.197,16.597 36.8,17.2 36.8,19 36.1,19.7
LCD_BACK: IC1.2 J4.8 | length 15.7
  Top Layer w0.3: J4.8@65.985,54.734 66.323,54.734 66.339,54.75 69,54.75 70.55,53.2 78.45,53.2 79.95,51.7 79.95,51.65 80.2,51.4 IC1.2@80.25,51.4
NetC1_2: C1.2 U1.F12 | length 2.3
  Top Layer w0.2: U1.F12@52,43.2 54.275,43.2 C1.2@54.3,43.225
NetC2_2: C2.2 U1.D14 | length 2.5
  Top Layer w0.15: U1.D14@50.4,44.8 50.4,44.816 50.2,45.016 50.2,45.4 50.8,46 50.812,46 50.9,46.088 50.9,46.625 C2.2@51.1,46.825
NetC3_2: C3.2 R31.2 R32.2 R33.2 U21.6 | length 8.5
  Top Layer w0.2: R31.2@62.6,39.85 R33.2@67.4,39.85 67.425,39.875 C3.2@68.9,39.875 ; U21.6@63.9,41.35 64.345,41.35 64.497,41.198 64.502,41.198 65,40.7 R32.2@65,39.85
NetC13_2: C13.2 R13.1 | length 1.5
  Top Layer w0.2: R13.1@67.3,74.95 67.3,75.6 67.4,75.7 67.4,76.325 C13.2@67.475,76.4
NetC14_2: C14.2 FB4.2 U5.15 U5.16 U5.17
NetC18_2: C18.2 R16.1 | length 2.1
  Top Layer w0.2: C18.2@62,74.425 62.05,74.425 62.4,74.775 62.4,74.825 63,75.425 63.175,75.425 R16.1@63.5,75.75
NetC47_1: C47.1 U6.5 | length 3
  Top Layer w0.3: C47.1@76.025,67.7 76.025,67.65 75.6,67.225 75.6,66.3 76.2,65.7 U6.5@76.772,65.7
NetC50_2: C50.2 R38.1 | length 3.3
  Top Layer w0.2: C50.2@77.975,54.85 78.325,54.5 78.325,54.275 78.575,54.025 79.65,54.025 80.075,54.45 80.125,54.45 80.45,54.775 R38.1@80.45,54.825
NetC51_2: C51.2 U22.F12 | length 2.4
  Top Layer w0.3: U22.F12@77.9,43.2 78.5,43.2 78.6,43.1 80.025,43.1 C51.2@80.2,42.925
NetC52_2: C52.2 U23.F12 | length 2.4
  Top Layer w0.2: U23.F12@91.2,32.5 93.225,32.5 C52.2@93.5,32.225
NetC53_2: C53.2 U22.D14 | length 2.4
  Top Layer w0.15: U22.D14@76.3,44.8 76.251,44.849 76.251,44.999 76,45.25 76,46.625 C53.2@76.3,46.925
NetC54_2: C54.2 U23.D14 | length 2.4
  Top Layer w0.2: U23.D14@89.6,34.1 89.25,34.45 89.25,34.875 89.792,35.417 89.792,36.017 C54.2@89.875,36.1
NetC66_2: C66.2 C67.2 C68.2 FB11.2 R53.1 U27.L9 | length 18.5
  Top Layer w0.127: C68.2@19.3,17.2 19.48,17.2 20.066,17.787 20.066,17.966 20.6,18.5 26.5,18.5 27.139,17.861 27.139,17.611 U27.L9@27.23,17.52
  Top Layer w1: R53.1@19.225,14.9 16.25,14.9 16.25,12.95 ccw(c16.4,12.95) FB11.2@16.4,12.8 19.95,12.8 cw(c19.95,12.35) C66.2@20.4,12.35
NetC69_2: C69.2 C71.2 FB12.1 R55.2 R56.2 U27.D1 | length 5.1
  Top Layer w1: R55.2@40,8.475 cw(c40.025,8.475) 40.025,8.5 FB12.1@42.45,8.5 42.45,10.1 ccw(c41.8,10.1) C69.2@41.8,10.75
NetC75_2: C75.2 U27.K1 | length 2.9
  Top Layer w0.2: U27.K1@37.39,16.25 37.45,16.25 38.9,17.7 C75.2@39.725,17.7
NetC77_2: C77.2 U4.B6 | length 4.9
  Top Layer w0.15: C77.2@38.3,66.575 38.35,66.575 38.725,66.95 38.725,67 39.125,67.4 40.5,67.4 41,67.9 42.1,67.9 U4.B6@42.5,68.3
NetC78_2: C78.2 U4.A6 | length 3.4
  Top Layer w0.15: C78.2@39.8,66.575 42.075,66.575 42.5,67 U4.A6@42.5,67.5
NetC85_1: C85.1 C86.2 E1.2 | length 0.6
  Top Layer w0.162: C86.2@15.045,76.75 15.045,76.8 15.414,77.169 C86.2@15.464,77.169
NetC85_2: C85.2 L3.2 U30.2 | length 28.3
  Top Layer w0.344: C85.2@18.325,76.6 19.812,76.6 L3.2@19.975,76.438 19.975,74.113 ccw(c22.54,74.113) 20.726,72.299 26.249,66.776 cw(c24.435,64.962) 27,64.962 U30.2@27,52.5
NetC91_2: C91.2 R74.1 RST.B1 RST.B2 U30.87 | length 33
  Top Layer w0.15: RST.B2@10.9,61.8 RST.B1@17.6,61.8 17.5,61.7 v2(17.5,60.1) ; U30.87@30,49.5 32.25,49.5 R74.1@32.5,49.75 C91.2@32.5,51.325 32.488,51.337 31.863,51.337 30.6,52.6 v2(30.6,55.5)
  Inner Layer 3 w0.15: v2(17.5,60.1) 17.5,60 22,55.5 v2(30.6,55.5)
NetC94_1: C94.1 U29.5 | length 1.6
  Top Layer w0.344: C94.1@84.475,70.4 84.625,70.55 U29.5@85.997,70.55
NetC97_2: C97.2 R66.1 | length 1
  Top Layer w0.2: R66.1@89.15,67.4 C97.2@90.18,67.4
NetC98_2: C98.2 R15.2 R23.2 U5.11 | length 15.5
  Top Layer w0.15: v2(62.2,71.8) 62.257,71.743 62.257,71.544 62.357,71.445 62.395,71.445 62.439,71.4 U5.11@62.809,71.4 ; v2(62.5,60.8) 62.5,60.876 62.35,61.026 R15.2@62.35,61.7 R23.2@63.65,61.7
  Top Layer w0.2: v2(62.2,71.8) 62.2,72.9 C98.2@62.3,73
  Inner Layer 4 w0.15: v2(62.2,71.8) 62.5,71.5 v2(62.5,60.8)
NetCR1_1: CR1.1 R27.2 R30.2 U13.5 U13.8 U13.13 U13.16 U14.1 U16.8 | length 49.1
  Top Layer w0.3: CR1.1@63.637,26.9 63.737,26.8 v2(64.7,26.8) ; v3(65.798,12.6) 65.825,12.627 U13.13@65.825,13.398 ; U13.8@65.825,17.202 65.825,18.325 66.5,19 68.85,19 68.976,19.126 69.4,19.126 R27.2@70.05,19.776 ; U13.16@67.775,13.398 67.775,12.625 v3(67.8,12.6) ; U13.5@67.775,17.202 67.775,17.775 68,18 69.5,18 ; U14.1@68.972,22.925 68.893,22.846 68.893,21.776 69.069,21.6 69.4,21.6 70.05,20.95 R27.2@70.05,20.2 ; R30.2@72.8,20.2 72.8,20.95 73.65,21.8 73.924,21.8 74.1,21.976 74.1,22.746 74.021,22.825 U16.8@73.628,22.825
  Top Layer w1: R27.2@70.05,20.2 R30.2@72.8,20.2
  Bottom Layer w0.3: v2(64.7,26.8) 71.1,20.4 v3(71.3,20.4) ; v3(65.798,12.6) 65.8,12.602 65.8,18.4 67.3,19.9 v3(70.1,19.9) ; v3(67.8,12.6) 67.8,12.668 68,12.868 68,18.1 69,19.1 v3(70.1,19.1)
NetD1_2: D1.2 L2.2 U5.20 | length 7.4
  Top Layer w0.25: U5.20@65.8,68.409 65.8,67.8 66,67.6
  Top Layer w0.5: 66,67.6 66.75,67.6 68.825,65.525 L2.2@69.1,65.525
  Top Layer w0.6: L2.2@69.1,65.525 71.5,65.525 D1.2@71.6,65.425
NetD2_1: D2.1 L1.1 U5.18 | length 6
  Top Layer w0.2: 64.8,67.6 U5.18@64.8,68.409
  Top Layer w0.4: L1.1@63.525,66.1 63.525,66.375 63.925,66.775 63.975,66.775 64.8,67.6
  Top Layer w0.6: D2.1@62.55,63.6 62.95,63.6 63.4,64.05 63.4,65.975 L1.1@63.525,66.1
NetD3_2: D3.2 J1.A4 J1.A9 J1.B4 J1.B9 | length 11.8
  Top Layer w0.4: J1.A9@6.275,18.375 4.225,18.375 3.8,18.8 3.8,21.9 4.477,22.577 4.877,22.577 J1.B9@4.925,22.625 J1.A4@6.275,22.625 8.125,22.625 D3.2@9.1,23.6
NetD4_1: D4.1 D5.3 | length 7.7
  Top Layer w0.2: D5.3@105.4,18.089 105.375,18.064 105.375,13.525 106.7,12.2 D4.1@106.7,10.9
NetD4_3: D4.3 R73.1 | length 3.2
  Top Layer w0.2: R73.1@103.5,8 103.75,7.75 104.325,7.75 105.4,8.825 D4.3@105.4,9.55
NetD5_1: D5.1 D6.3 | length 7.7
  Top Layer w0.2: D6.3@105.5,26.629 105.5,25.725 106.7,24.525 D5.1@106.7,19.439
NetD6_1: D6.1 D7.3 | length 7.7
  Top Layer w0.2: D7.3@105.5,35.168 105.475,35.143 105.475,30.975 106.8,29.65 D6.1@106.8,27.979
NetD7_1: D7.1 D8.3 | length 7.7
  Top Layer w0.2: D8.3@105.55,43.707 105.5,43.657 105.5,39.675 106.8,38.375 D7.1@106.8,36.518
NetD8_1: D8.1 D9.3 | length 7.8
  Top Layer w0.2: D9.3@105.45,52.246 105.375,52.171 105.375,47.9 106.85,46.425 D8.1@106.85,45.057
NetD9_1: D9.1 D10.3 | length 7.7
  Top Layer w0.2: D10.3@105.45,60.786 105.45,56.875 106.75,55.575 D9.1@106.75,53.596
NetD10_1: D10.1 D11.3 | length 7.8
  Top Layer w0.2: D11.3@105.35,69.325 105.35,69.225 105.675,68.9 105.675,64.25 106.75,63.175 D10.1@106.75,62.136
NetDNP_1: DNP.1 R4.1 U30.63 | length 4.5
  Top Layer w0.2: R4.1@23.65,23.6 23.65,25.05 23.975,25.375 24.025,25.375 24.9,26.25 24.9,27.4 U30.63@25,27.5
NetFB1_2: FB1.2 U1.A11 U1.A13 | length 4.3
  Top Layer w0.2: FB1.2@45.575,43.2 46.8,43.2 ; U1.A11@48,42.4 47.6,42.4 46.8,43.2 ; U1.A13@48,44 47.6,44 46.8,43.2
NetFB2_2: FB2.2 U1.E6 U1.E7 U1.E8 | length 5
  Top Layer w0.15: U1.E8@51.2,40 51.62,40.42 52.632,40.42 52.812,40.6 FB2.2@54.2,40.6
  Top Layer w0.2: U1.E6@51.2,38.4 51.2,38.415 51.406,38.62 51.406,38.98 51.2,39.185 U1.E8@51.2,40
NetFB3_2: FB3.2 U1.A14 U1.C14 | length 5.2
  Top Layer w0.2: U1.A14@48,44.8 48,46.1 48.5,46.6 49.375,46.6 FB3.2@49.6,46.825 U1.C14@49.6,44.8
NetFB5_2: FB5.2 U22.A11 U22.A13 | length 4.5
  Top Layer w0.3: FB5.2@71.575,43.1 72.4,43.1 ; U22.A11@73.9,42.4 73.6,42.7 72.8,42.7 72.4,43.1 ; U22.A13@73.9,44 73.5,43.6 72.9,43.6 72.4,43.1
NetFB6_2: FB6.2 U23.A11 U23.A13 | length 4.2
  Top Layer w0.2: FB6.2@84.975,33.3 86.5,33.3 ; U23.A11@87.2,31.7 87.161,31.739 86.961,31.739 86.5,32.2 86.5,33.3 ; U23.A13@87.2,33.3 86.5,33.3
NetFB7_2: FB7.2 U22.E6 U22.E7 U22.E8 | length 4.9
  Top Layer w0.15: U22.E8@77.1,40 77.5,40.4 78.4,40.4 78.7,40.7 78.8,40.7
  Top Layer w0.3: U22.E6@77.1,38.4 U22.E7@77.1,39.2 U22.E8@77.1,40 ; 78.8,40.7 FB7.2@80.125,40.7
NetFB8_2: FB8.2 U23.E6 U23.E7 U23.E8 | length 5.1
  Top Layer w0.15: U23.E8@90.4,29.3 90.8,29.7 91.7,29.7
  Top Layer w0.2: U23.E6@90.4,27.7 U23.E7@90.4,28.5 U23.E8@90.4,29.3 ; 91.7,29.7 91.9,29.7 92.5,30.3 FB8.2@93.525,30.3
NetFB9_2: FB9.2 U22.A14 U22.C14 | length 3.4
  Top Layer w0.3: U22.A14@73.9,44.8 74.7,45.6 ; FB9.2@74.6,46.725 74.7,46.625 74.7,45.6 ; U22.C14@75.5,44.8 74.7,45.6
NetFB10_2: FB10.2 U23.A14 U23.C14 | length 5.3
  Top Layer w0.2: FB10.2@84.975,34.9 86.4,34.9 ; U23.A14@87.2,34.1 86.4,34.9 ; U23.C14@88.8,34.1 88,34.9 86.4,34.9
NetIC1_1: IC1.1 R42.1 | length 1.8
  Top Layer w0.3: IC1.1@80.25,49.5 81.9,49.5 R42.1@82,49.6
NetJ1_A5: J1.A5 R61.1 | length 9.2
  Top Layer w0.2: R61.1@2.95,26.5 3.05,26.6 v2(3.6,26.6)
  Inner Layer 4 w0.2: v2(3.6,26.6) 3.642,26.6 3.842,26.4 6.4,26.4 7.2,25.6 7.2,22.2 6.775,21.775 J1.A5@6.275,21.775
NetJ1_B5: J1.B5 R64.1 | length 5.6
  Top Layer w0.2: R64.1@3.35,14.6 3.675,14.925 3.675,15.067 3.7,15.092 v2(3.7,15.5)
  Inner Layer 2 w0.2: v2(3.7,15.5) 3.748,15.548 3.748,15.69 3.8,15.742 3.8,18.7 4.325,19.225 J1.B5@4.925,19.225
NetJ3_2: J3.2 U25.3 | length 23
  Top Layer w0.15: U25.3@88.975,20.902 89.049,20.976 89.049,21.449 89.3,21.7 v2(93.4,21.7)
  Inner Layer 4 w0.15: v2(93.4,21.7) 95.83,24.13 J3.2@95.83,38.71
NetJ3_4: J3.4
NetJ3_6: J3.6 | length 0.1
  Top Layer w0.2: J3.6@90.61,38.71 J3.6@90.75,38.71
NetJ3_8: J3.8
NetJ4_1: J4.1 U30.14 | length 56.5
  Top Layer w0.15: U30.14@15,52.5 15,50.85 v2(15.025,50.825)
  Top Layer w0.2: J4.1@65.985,51.234 66.941,51.234 v2(66.975,51.2)
  Inner Layer 3 w0.15: v2(15.025,50.825) 15.025,50.625 15.795,49.855 21.555,49.855 23.745,52.045 48.774,52.045 49.123,51.696 49.477,51.696 49.581,51.8 66.375,51.8 v2(66.975,51.2)
NetJ4_3: J4.3 U30.13 | length 55.2
  Top Layer w0.15: U30.13@16,52.5 16,50.9 v2(16.05,50.85)
  Top Layer w0.2: J4.3@65.985,52.234 66.709,52.234 66.973,52.498 v2(66.975,52.498)
  Inner Layer 3 w0.15: v2(16.05,50.85) 16.107,50.793 16.107,50.668 16.653,50.122 21.444,50.122 23.634,52.312 48.754,52.312 48.992,52.55 49.55,52.55 49.75,52.35 66.325,52.35 66.473,52.498 v2(66.975,52.498)
NetJ4_4: J4.4 U30.12 | length 52.1
  Top Layer w0.15: U30.12@17,52.5 17.05,52.45 v2(17.05,50.875)
  Top Layer w0.2: v2(65,52.798) 65.068,52.798 65.132,52.734 J4.4@65.985,52.734
  Inner Layer 3 w0.15: v2(17.05,50.875) 17.05,50.725 17.402,50.373 21.34,50.373 23.53,52.563 48.65,52.563 48.888,52.802 49.654,52.802 49.854,52.602 64.475,52.602 64.614,52.741 64.943,52.741 v2(65,52.798)
NetJ4_5: J4.5 U30.11 | length 52.9
  Top Layer w0.15: U30.11@18,52.5 18,50.925 v2(18.004,50.921)
  Top Layer w0.2: J4.5@65.985,53.234 66.966,53.234 v2(66.975,53.225)
  Inner Layer 3 w0.15: v2(18.004,50.921) 18.277,50.648 21.227,50.648 23.394,52.815 48.546,52.815 48.784,53.053 49.758,53.053 49.958,52.853 64.357,52.853 64.729,53.225 v2(66.975,53.225)
NetJ4_6: J4.6 U30.8 | length 47.4
  Top Layer w0.15: U30.8@21,52.5 21,51.325 v2(21.025,51.3)
  Top Layer w0.2: v2(65.025,53.725) 65.034,53.734 J4.6@65.985,53.734
  Inner Layer 3 w0.15: v2(21.025,51.3) 21.05,51.275 21.497,51.275 23.29,53.068 48.443,53.068 48.702,53.327 49.841,53.327 50.063,53.105 64.178,53.105 64.743,53.67 64.97,53.67 v2(65.025,53.725)
NetJ5_1: J5.1 R67.2 U30.21 | length 22.1
  Top Layer w0.125: U30.21@8,52.5 v2(8,53.9) ; J5.1@9.83,69.25 11.65,69.25 12.288,68.612 12.338,68.612 12.7,68.25 R67.2@12.7,68.2
  Inner Layer 4 w0.125: v2(8,53.9) 8,56 10.3,58.3 10.3,64.4 11.4,65.5 11.4,67.68 J5.1@9.83,69.25
NetJ5_3: J5.3 R54.2 | length 2.8
  Top Layer w0.15: J5.3@7.29,69.25 7.29,71.94 R54.2@7.35,72
NetJ5_5: J5.5 U30.54 | length 55.5
  Top Layer w0.15: v2(15.9,28.8) 15.9,28.719 16,28.619 U30.54@16,27.5
  Inner Layer 4 w0.15: J5.5@4.75,69.25 4.6,69.4 4.6,71.1 5.2,71.7 11.4,71.7 12.3,70.8 12.3,49.6 15.9,46 v2(15.9,28.8)
  Bottom Layer w0.125: J5.5@4.75,69.25 J5.5@5.048,69.548
NetJ5_7: J5.7 U30.55 | length 60.2
  Top Layer w0.15: U30.55@17,27.5 v2(17,28.9)
  Inner Layer 4 w0.15: J5.7@2.21,69.25 2.21,71.71 3.1,72.6 12.6,72.6 13.2,72 13.2,50.5 17,46.7 v2(17,28.9)
  Bottom Layer w0.125: J5.7@2.21,69.24 J5.7@2.21,69.25
NetL2_1: L2.1 U5.1 | length 2.9
  Top Layer w0.25: U5.1@66.791,69.4 67.3,69.4 67.6,69.1
  Top Layer w0.5: 67.6,69.1 68.275,68.425 68.75,68.425 L2.1@69.1,68.075
NetR1_1: R1.1 U1.C5 | length 4.5
  Top Layer w0.15: R1.1@45.5,37.75 46.65,37.75 47.2,37.2 49.2,37.2 U1.C5@49.6,37.6
NetR1_2: R1.2 U1.C4 | length 5.4
  Top Layer w0.15: R1.2@45.5,36.45 46.55,36.45 47.4,35.6 49.1,35.6 49.2,35.7 49.2,36.4 U1.C4@49.6,36.8
NetR2_2: R2.2 U6.4 U7.3 U29.4 U30.18 U31.3 | length 103.4
  Top Layer w0.2: U30.18@11,52.5 v2(11,54) 11,55.008 11.025,55.033 11.025,55.175 R2.2@11.35,55.5 ; U7.3@78.55,57.972 78.55,57.318 78.6,57.268 v2(78.6,57.2) ; v2(85.15,71.275) 85.218,71.275 85.293,71.2 U29.4@85.997,71.2 ; U31.3@87.953,64.975 88.11,64.975 88.153,65.018 88.153,65.06 88.35,65.257 v2(88.35,65.325)
  Top Layer w0.3: v2(76.2,66.6) 76.45,66.35 U6.4@76.772,66.35
  Inner Layer 3 w0.2: v2(11,54) 11.068,54 11.22,54.152 49.552,54.152 52.3,56.9 78.342,56.9 78.6,57.158 v2(78.6,57.2)
  Inner Layer 4 w0.2: v2(76.2,66.6) 76.7,66.6 ; v2(78.6,57.2) 78.6,64.7 76.7,66.6 ; v2(85.15,71.275) 85.15,68.525 87.075,66.6 ; v2(88.35,65.325) 87.075,66.6 ; 76.7,66.6 87.075,66.6
NetR3_2: R3.2 U27.L4 U30.19 | length 64.6
  Top Layer w0.2: R3.2@9.75,55.5 9.796,55.454 9.796,54.304 v2@9.9,54.2 ; v2(9.796,54.2) v2@9.9,54.2 ; U30.19@10,52.5 9.796,52.704 9.796,54.096 v2@9.9,54.2 ; v2(33.2,18.3) 33.2,17.9 U27.L4@33.58,17.52
  Inner Layer 3 w0.2: v2(9.796,54.2) 10.2,54.604 v2(31.6,54.604)
  Inner Layer 4 w0.15: v2(31.6,54.604) 31.575,54.579 31.575,54.154 31.5,54.079 31.5,50.6 29.9,49 29.9,21.6 v2(33.2,18.3)
NetR5_2: R5.2 R26.1 U30.64 | length 53.7
  Top Layer w0.2: v5(25.475,26.175) 25.514,26.214 25.814,26.214 26,26.4 U30.64@26,27.5 ; v5(55.625,6.852) R5.2@55.625,8 55.675,8.05 R26.1@56.8,8.05
  Inner Layer 3 w0.2: v5(25.35,6.875) 25.373,6.852 v5(55.625,6.852)
  Inner Layer 4 w0.2: v5(25.35,6.875) 25.35,23.765 25.377,23.792 25.377,25.908 25.418,25.948 25.418,26.118 v5(25.475,26.175)
NetR6_2: R6.2 R29.1 U30.65 | length 62.8
  Top Layer w0.2: U30.65@27,27.5 27.033,27.467 27.033,26.456 27.25,26.239 v5(27.25,26.2) ; v5(67.958,7.991) 67.958,7.517 R29.1@68.275,7.2 69.625,7.2 R6.2@69.65,7.175
  Inner Layer 3 w0.2: v5(26.5,10.725) 26.5,10.225 26.7,10.025 32.45,10.025 33.652,8.823 67.002,8.823 67.707,8.118 67.75,8.118 67.877,7.991 v5(67.958,7.991)
  Inner Layer 4 w0.2: v5(26.5,10.725) 26.5,18.9 27.7,20.1 27.7,25.8 27.3,26.2 v5(27.25,26.2)
NetR7_1: R7.1 R8.2 U3.2 | length 3.6
  Top Layer w0.15: R7.1@52.85,54.5 R8.2@53.85,54.5 53.85,55.65 53.5,56 U3.2@53.5,56.975
NetR9_2: R9.2 U4.B7 | length 2.1
  Top Layer w0.15: R9.2@39.65,68.2 40.8,68.2 40.9,68.3 U4.B7@41.7,68.3
NetR10_2: R10.2 U4.D7 | length 2.4
  Top Layer w0.15: R10.2@39.65,70.8 40.5,70.8 41.399,69.901 U4.D7@41.7,69.9
NetR11_2: R11.2 U4.C7 | length 2.2
  Top Layer w0.15: R11.2@39.65,69.5 39.75,69.4 40.6,69.4 40.9,69.1 U4.C7@41.7,69.1
NetR12_2: R12.2 R22.2 U5.5 | length 4.9
  Top Layer w0.2: U5.5@66.791,71.4 66.798,71.408 67.208,71.408 67.9,72.1 67.9,72.75 68.425,73.275 68.425,73.325 68.75,73.65 R22.2@68.8,73.65 68.85,73.7 R12.2@70.3,73.7
NetR13_2: R13.2 U5.6 | length 2.4
  Top Layer w0.2: U5.6@65.8,72.391 65.8,73.1 66.35,73.65 R13.2@67.3,73.65
NetR14_2: R14.2 U5.8 | length 2.1
  Top Layer w0.2: U5.8@64.8,72.391 R14.2@64.8,74.45
NetR15_1: R15.1 U5.12 | length 12.3
  Top Layer w0.15: R15.1@61.05,61.7 61.2,61.55 v2(61.2,60.9) ; v2(62,71.1) 62.038,71.1 62.238,70.9 U5.12@62.809,70.9
  Inner Layer 4 w0.15: v2(61.2,60.9) 61.2,70.2 61.882,70.882 61.882,70.901 62,71.019 v2(62,71.1)
NetR16_2: R16.2 U5.10 | length 2.2
  Top Layer w0.2: R16.2@63.5,74.45 63.5,73.5 63.8,73.2 U5.10@63.8,72.391
NetR17_1: R17.1 R21.2 U6.2 | length 3.6
  Top Layer w0.3: U6.2@78.828,65.7 79.675,65.7 80.2,65.175 80.525,65.175 R21.2@80.8,64.9 80.75,64.85 R17.1@80.75,63.6
NetR18_2: R18.2 U26.7 | length 2.7
  Top Layer w0.15: R18.2@34.6,26.15 34.7,26.05 34.7,25.6 35.1,25.2 36,25.2 36.1,25.1 U26.7@36.1,24.599
NetR19_2: R19.2 U26.6 | length 1.8
  Top Layer w0.15: R19.2@35.9,26.15 35.934,26.15 36.284,25.8 36.284,25.616 36.5,25.4 U26.6@36.5,24.599
NetR20_1: R20.1 U3.4 U30.70 | length 54.6
  Top Layer w0.15: v2(32.8,34.4) 32.8,33.75 R20.1@32.95,33.6 ; U3.4@54.15,59.025 54.15,59.55 v2(54.4,59.8)
  Top Layer w0.2: U30.70@30,32.5 31.4,32.5 32.342,33.442 32.792,33.442 R20.1@32.95,33.6
  Inner Layer 3 w0.15: v2(32.8,34.4) 32.811,34.4 33.038,34.173 34.873,34.173 34.9,34.2 50.1,34.2 50.5,33.8 53.3,33.8 53.5,33.6 v2(55.3,33.6)
  Inner Layer 4 w0.15: v2(54.4,59.8) 54.4,52.9 55.3,52 v2(55.3,33.6)
NetR24_1: R24.1 R27.1 U9.5 U9.8 U9.13 U9.16 U10.1 U13.1 U13.4 U13.9 U13.12 U14.8 | length 21
  Top Layer w0.3: v3(54.3,14.2) 54.325,14.225 U9.8@55.198,14.225 ; v3(54.3,16.2) 54.325,16.175 U9.5@55.198,16.175 ; U9.13@59.002,14.225 60.825,14.225 v3@60.9,14.3 ; U9.16@59.002,16.175 60.775,16.175 v3(60.8,16.2) ; U10.1@59.472,23.125 59.822,23.125 59.901,23.046 59.901,22 59.932,21.968 59.932,20.818 R24.1@60.55,20.2 ; v3@63.3,14.3 v3(63.325,14.325) U13.12@64.898,14.325 ; v3@63.3,16.3 v3(63.325,16.275) U13.9@64.898,16.275 ; R27.1@63.55,20.2 63.55,20.95 64.2,21.6 64.524,21.6 64.7,21.776 64.7,22.846 64.628,22.918 U14.8@64.628,22.925 ; U13.1@68.702,14.325 v3(69.725,14.325) v3@69.8,14.4 ; U13.4@68.702,16.275 69.684,16.275 69.759,16.2 v3(69.8,16.2)
  Top Layer w1: R24.1@60.55,20.2 R27.1@63.55,20.2
  other v3: 60.8,14.263 60.8,15.3